# EAGLE board Secondary_PCB_Layout (EAGLE 9.7.0)
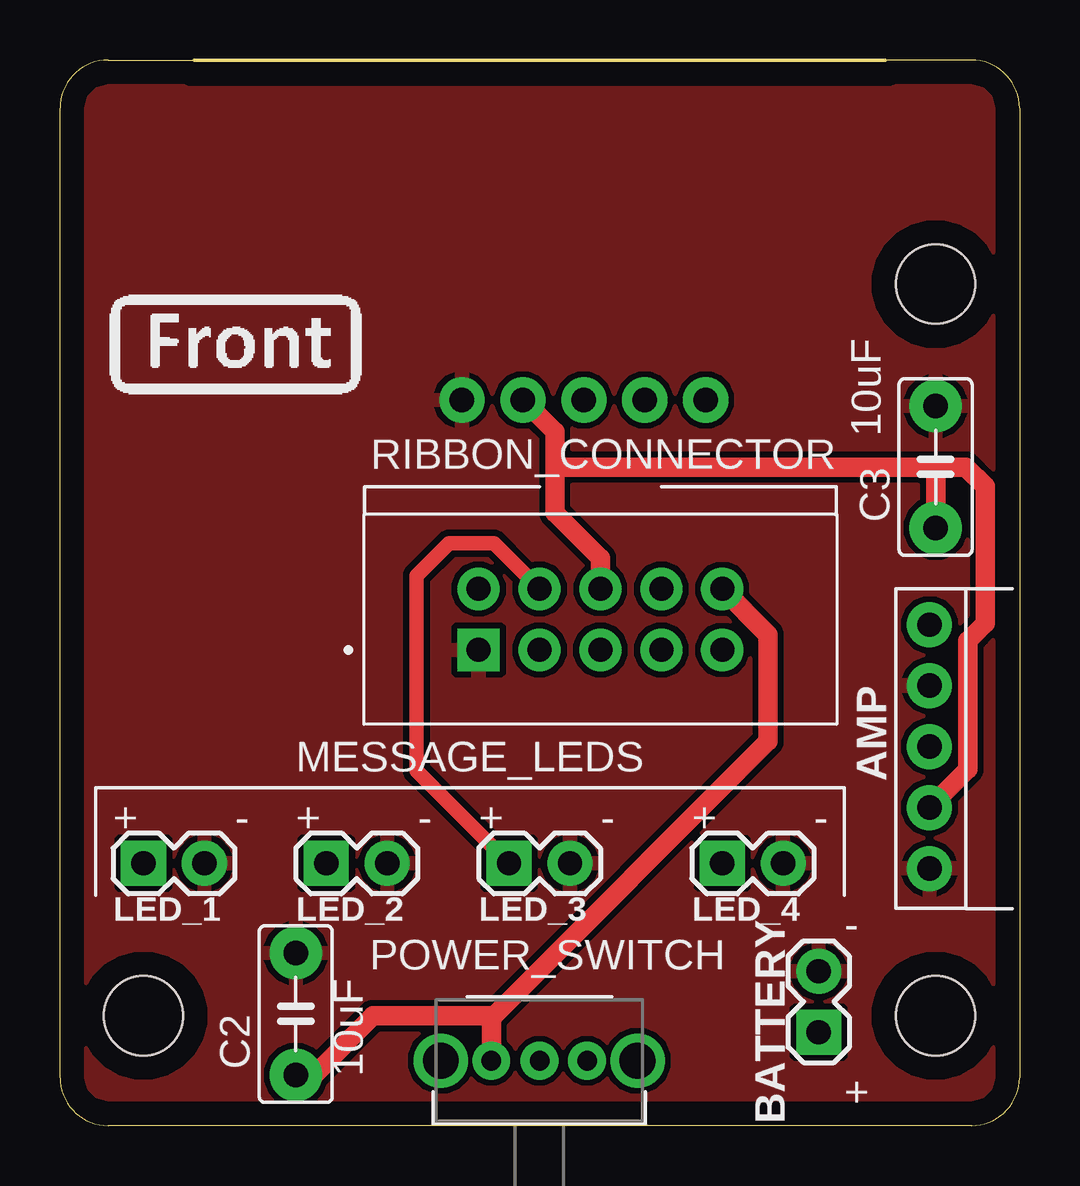
[diagram p0: board, top side]
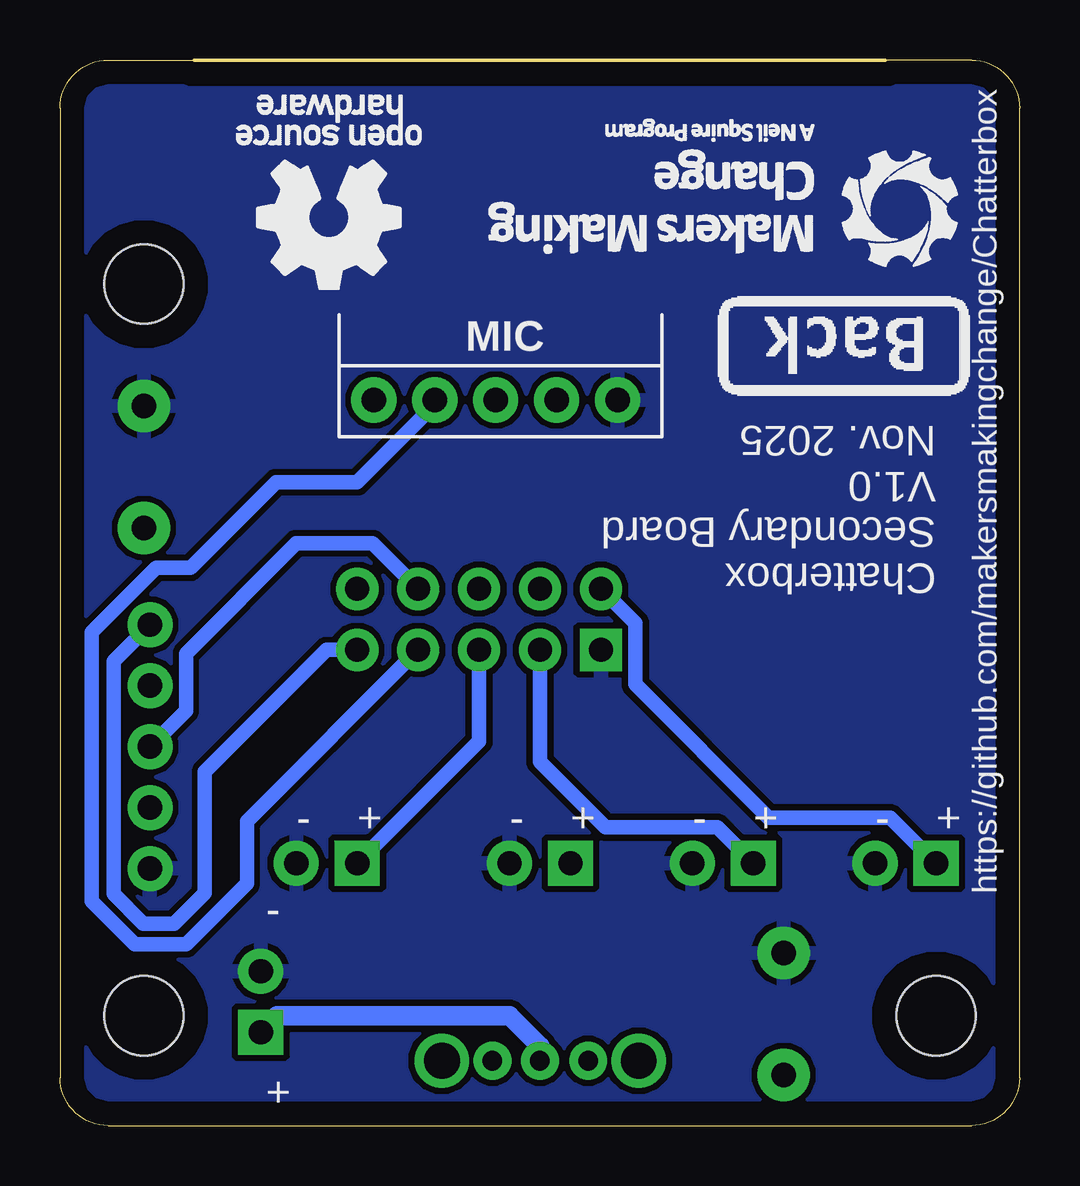
[diagram p1: board, bottom side, seen from below]

Size 40 x 44.4 mm. Coordinates in mm from the lower left corner, seen from the top.
Outline: 25.6,44.4 14.4,44.4
Outline: 2,44.4 5.6,44.4 34.4,44.4 38,44.4 arc-90 40,42.4 40,2 arc-90 38,0 2,0 arc-90 0,2 0,42.4 arc-90 2,44.4
Copper layers (1*16): Top / Bottom
Stack-up Default Layer Stack: Top SilkScreen Epoxy Ink / Top SolderMask SR:Green 0.0254mm Dk 4.3 / Top Surface Finish Lead-Free 0.02mm / Top CuFoil:007 0.035mm / Dielectric-1 User Defined 1.5mm / Bottom CuFoil:007 0.035mm / Bottom Surface Finish Lead-Free 0.02mm / Bottom SolderMask SR:Green 0.0254mm Dk 4.3 / Bottom SilkScreen Epoxy Ink
Design rules: minimum copper width 16mil, minimum drill size 0.35mm, copper clearance wire_polygon to wire_polygon 10mil, copper clearance wire_polygon to pad_smd 10mil, copper clearance wire_polygon to via 6mil, copper clearance pad_smd to pad_smd 6mil, copper clearance pad_smd to via 6mil, copper clearance via to via 6mil, copper clearance smd to pad (same net) 6mil, copper clearance smd to via (same net) 6mil, copper clearance smd to smd (same net) 6mil, dimension clearance 40mil, via restrict clearance 0mil, restrict clearance 0mil, drill distance 6mil, keepout clearance 0mil

## Footprints (pad centres in the part's own frame; a part is rotated, then mirrored left to right if it is on the bottom)
HEADER_MALE-1X05 = drill 1.016 pad 1.88: 1 0,0; 2 2.54,0; 3 5.08,0; 4 7.62,0; 5 10.16,0
HEADER_MALE-1X02 = drill 1.016 pad 1.88 square: 1 0,0 | drill 1.016 pad 1.88: 2 2.54,0
CAP-050-030X075 = drill 1.016 pad 2.184: 1 -2.54,0; 2 2.54,0
SWITCH_SPDT_11MA1QS1 = drill 0.813 pad 1.321: 1 -2.007,0; 2 0,0; 3 1.981,0 | drill 1.499 pad 2.007: 4 -4.115,0; 5 4.089,0
AMPHENOL_86130101014345E1LF = drill 1 pad 1.508 square: 01 -5.08,-1.27 | drill 1 pad 1.508: 02 -5.08,1.27; 03 -2.54,-1.27; 04 -2.54,1.27; 05 0,-1.27; 06 0,1.27; 07 2.54,-1.27; 08 2.54,1.27; 09 5.08,-1.27; 10 5.08,1.27
STAND-OFF = hole 3.302: 0,0

## Placement (x,y rotation side)
AMP  HEADER_MALE-1X05  [HEADER_MALE-1X05]  36.25,20.87 270 top
BATTERY  HEADER_MALE-1X02  [HEADER_MALE-1X02]  31.63,3.89 90 top
C2  CAPACITOR-US-050-030X075  [CAP-050-030X075]  9.83,4.65 90 top
C3  CAPACITOR-US-050-030X075  [CAP-050-030X075]  36.5,27.44 90 top
LED_1  HEADER_MALE-1X02  [HEADER_MALE-1X02]  3.48,10.93 0 top
LED_2  HEADER_MALE-1X02  [HEADER_MALE-1X02]  11.1,10.93 0 top
LED_3  HEADER_MALE-1X02  [HEADER_MALE-1X02]  18.72,10.93 0 top
LED_4  HEADER_MALE-1X02  [HEADER_MALE-1X02]  27.61,10.93 0 top
MIC  HEADER_MALE-1X05  [HEADER_MALE-1X05]  26.92,30.23 0 bottom
POWER_SWITCH  SWITCH-SPDT-OS102011  [SWITCH_SPDT_11MA1QS1]  19.99,2.7 0 top
RIBBON_CONNECTOR  86130101014345E1LF  [AMPHENOL_86130101014345E1LF]  22.53,21.09 0 top
U$1  MMC_LOGO-SM  [MMC_SMALL_LOGO]  13.64,38.87 180 bottom
U$2  OSHW_LOGO-SM  [OSHW_SMALL_LOGO]  28.88,38.87 180 bottom
U$3  MMC_LABEL-BACK  [LABEL-BACK]  7.29,32.52 180 bottom
U$4  MMC_LABEL-FRONT  [LABEL-FRONT]  7.29,32.52 0 top
U$17  STAND-OFF-  [STAND-OFF]  36.5,35.06 0 top
U$18  STAND-OFF-  [STAND-OFF]  36.5,4.58 0 top
U$19  STAND-OFF-  [STAND-OFF]  3.48,4.58 0 top

## Library data of the parts
AMP BATTERY C2 C3 LED_1-LED_4 MIC POWER_SWITCH U$1-U$4 U$17-U$19 = MMC_Eagle
RIBBON_CONNECTOR = 86130101014345E1LF; MANUFACTURER: Amphenol; PARTREV: C; STANDARD: Manufacturer Recommendations

## Nets
+5V: AMP.4 C3.1 MIC.4 RIBBON_CONNECTOR.06
+9V: BATTERY.1 POWER_SWITCH.2
GND1: AMP.2 AMP.5 BATTERY.2 C2.2 C3.2 LED_1.2 LED_2.2 LED_3.2 LED_4.2 MIC.5 RIBBON_CONNECTOR.01
LED1: LED_1.1 RIBBON_CONNECTOR.02
LED2: LED_2.1 RIBBON_CONNECTOR.03
LED3: LED_3.1 RIBBON_CONNECTOR.04
LED4: LED_4.1 RIBBON_CONNECTOR.05
MIC: MIC.2 RIBBON_CONNECTOR.07
PWR: C2.1 POWER_SWITCH.1 RIBBON_CONNECTOR.10
SPK_SHT: AMP.3 RIBBON_CONNECTOR.08
VOL: AMP.1 RIBBON_CONNECTOR.09

## Tracks (layer width: path | path; a pad name or v marks a point on that pad's centre or on a via)
+5V
  Top 0.406: 36.5,27.28 36.66,27.44
  Top 0.813: RIBBON_CONNECTOR.06 22.53,23.63 20.62,25.53 20.62,27.44 | 20.62,27.44 36.5,27.44 C3.1 36.5,27.28 | 20.62,27.44 20.62,28.91 MIC.4 | 36.66,27.44 37.77,27.44 38.58,26.63 38.58,20.94 37.85,20.21 37.85,14.85 AMP.4
+9V
  Bottom 0.813: BATTERY.1 30.94,4.58 21.26,4.58 19.99,3.31 POWER_SWITCH.2
GND1
  pour Top: -2.87,89.67 -0.33,87.13 42.85,87.13 42.85,-6.85 45.39,-9.39 0.94,-9.39 -2.87,-5.58
  pour Bottom: -5.41,90.94 44.12,90.94 44.12,-9.39 40.31,-13.2 -2.87,-13.2 -5.41,-10.66
LED1
  Bottom 0.61: LED_1.1 5.39,12.84 10.47,12.84 16.01,18.38 16.01,20.93 17.44,22.36 RIBBON_CONNECTOR.02
LED2
  Bottom 0.61: RIBBON_CONNECTOR.03 19.99,15.16 17.26,12.43 12.6,12.43 LED_2.1
LED3
  Top 0.61: RIBBON_CONNECTOR.04 18.08,24.27 16.23,24.27 14.87,22.9 14.87,16.01 14.87,14.78 LED_3.1
LED4
  Bottom 0.61: RIBBON_CONNECTOR.05 22.53,16.01 LED_4.1
MIC
  Bottom 0.61: RIBBON_CONNECTOR.07 32.21,12.68 32.21,10.09 34.75,7.55 36.88,7.55 38.68,9.35 38.68,20.56 35.99,23.25 34.55,23.25 30.99,26.8 27.61,26.8 24.38,30.04 MIC.2
PWR
  Top 0.813: RIBBON_CONNECTOR.10 29.52,20.45 29.52,16.01 18.08,4.58 | 18.08,4.58 13.06,4.58 10.59,2.11 C2.1 | 18.08,4.58 17.98,4.48 POWER_SWITCH.1
SPK_SHT
  Bottom 0.61: RIBBON_CONNECTOR.08 26.97,24.27 30.15,24.27 34.75,19.67 34.75,17.29 AMP.3
VOL
  Bottom 0.61: AMP.1 37.77,19.35 37.77,9.66 36.52,8.41 35.23,8.41 33.96,9.69 33.96,14.74 28.88,19.82 RIBBON_CONNECTOR.09

## Text on the board
SilkscreenTop: 10uF | MESSAGE_LEDS | + | - | + | - | + | - | + | - | - | 10uF | +
SilkscreenBottom: Chatterbox / Secondary Board / V1.0 / Nov. 2025 | + | - | + | - | + | - | + | - | https://github.com/makersmakingchange/Chatterbox | - | +